# EAGLE board b pubsub_lower_bore_isolate 5V (EAGLE 9.4.2)
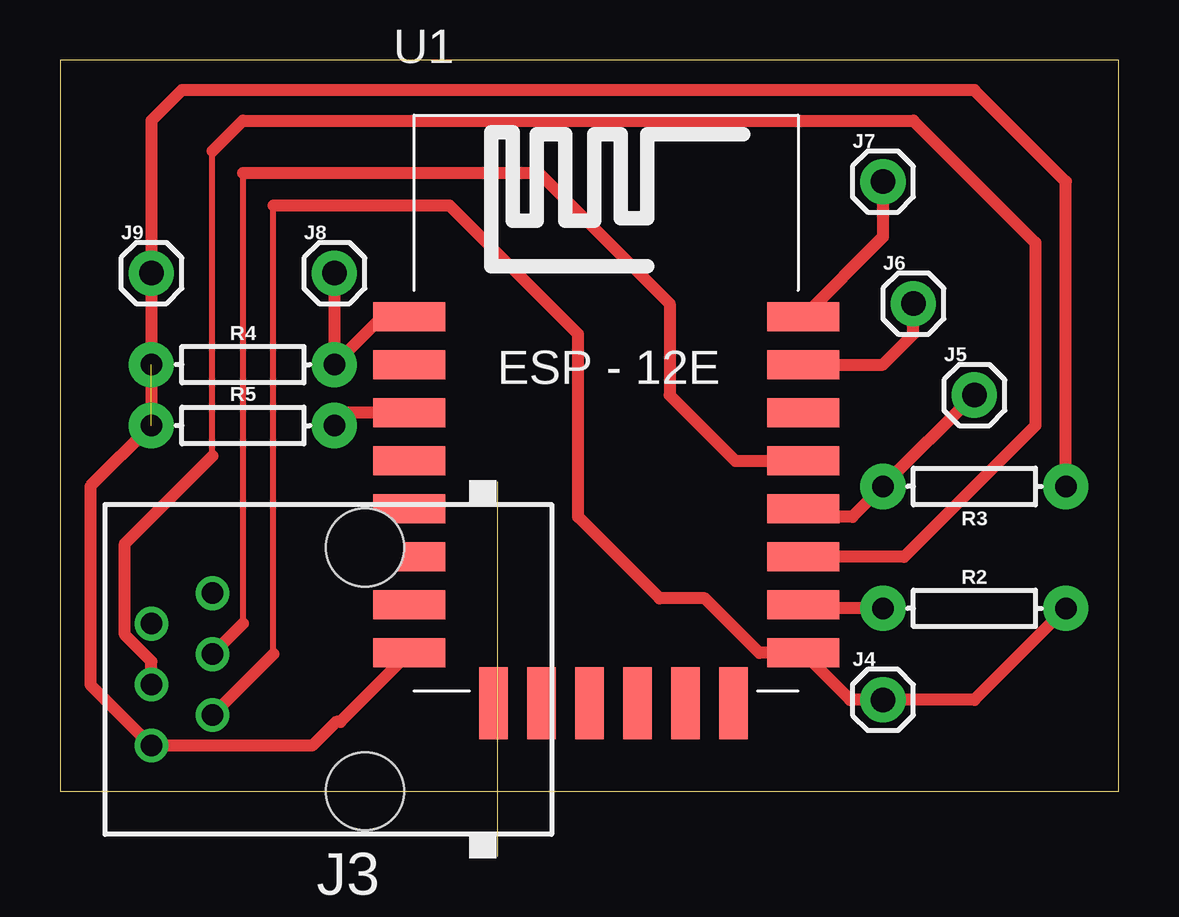
[diagram p0: board, top side]

Size 44.12 x 30.47 mm. Coordinates in mm from the lower left corner, seen from the top.
Outline: 0,0 44.12,0 44.12,30.47 0,30.47 0,0
Copper layers (1*16): Top 0.035mm / dielectric 1.5mm / Bottom 0.035mm
Design rules "default": minimum track width 6mil, minimum drill 0.35mm, track to track 6mil, track to pad 6mil, pad to pad 6mil, via to via 6mil, smd to smd 6mil, copper to edge 40mil, drill to drill 6mil, minimum pad ring 10mil, minimum via ring 8mil, stop-mask expansion 4mil, vias tented up to drill 0mil, thermal gap 10mil

## Footprints (pad centres in the part's own frame; a part is rotated, then mirrored left to right if it is on the bottom)
RJ11-NO_SHIELD = drill 0.9 pad 1.4: 1 -3.175,8.89; 2 -1.905,6.35; 3 -0.635,8.89; 4 0.635,6.35; 5 1.905,8.89; 6 3.175,6.35 | hole 3.251: -5.08,0; 5.08,0
1X01 = drill 1.016 pad 1.88: 1 0,0
AXIAL-0.3 = drill 0.9 pad 1.88: P$1 -3.81,0; P$2 3.81,0
ESP12E-SMD = smd 3 x 1.2: ADC -8.3,3.8; CH_PD -8.3,1.8; GND 8.1,-8.2; GPIO0 8.1,-2.2; GPIO2 8.1,-4.2; GPIO4 8.1,-0.2; GPIO5 8.1,1.8; GPIO12 -8.3,-4.2; GPIO13 -8.3,-6.2; GPIO14 -8.3,-2.2; GPIO15 8.1,-6.2; GPIO16 -8.3,-0.2; RESET -8.3,5.8; RXD0 8.1,3.8; TXD0 8.1,5.8; VCC -8.3,-8.2 | smd 1.2 x 3: CS0 -4.8,-10.3; GPIO9 -0.8,-10.3; GPIO10 1.2,-10.3; MISO -2.8,-10.3; MOSI 3.2,-10.3; SCLK 5.2,-10.3

## Placement (x,y rotation side)
J3  RJ11-6L-B  [RJ11-NO_SHIELD]  12.7,5.08 90 top
J4  [1X01]  34.29,3.81 0 top
J5  [1X01]  38.1,16.51 0 top
J6  [1X01]  35.56,20.32 0 top
J7  [1X01]  34.29,25.4 0 top
J8  [1X01]  11.43,21.59 0 top
J9  [1X01]  3.81,21.59 0 top
R2  1k  [AXIAL-0.3]  38.1,7.62 0 top
R3  1k  [AXIAL-0.3]  38.1,12.7 180 top
R4  1k  [AXIAL-0.3]  7.62,17.78 0 top
R5  1k  [AXIAL-0.3]  7.62,15.24 0 top
U1  [ESP12E-SMD]  22.86,13.97 0 top

## Library data of the parts
J3 = con-tycoelectronics; MF: TYCO ELECTRONICS; MPN: RJ11-6L-B; OC_FARNELL: unknown; OC_NEWARK: 52K3613
J4-J9 = SparkFun-Connectors
R2-R5 = SparkFun-Resistors; PROD_ID: RES-12182
U1 = esp8266modules

## Nets
+5V: J3.1 J9.1 R3.P$1 R4.P$1 R5.P$1 U1.VCC
GND: J3.2 J4.1 R2.P$2 U1.GND
N$1: J3.4 U1.GPIO4
N$3: R2.P$1 U1.GPIO15
N$4: J5.1 R3.P$2 U1.GPIO0
N$7: U1.GPIO5
N$13: J3.3 U1.GPIO2
N$14: J7.1 U1.TXD0
N$15: J6.1 U1.RXD0
N$16: J8.1 R4.P$2 U1.RESET
N$18: R5.P$2 U1.CH_PD

## Tracks (layer width: path | path; a pad name or v marks a point on that pad's centre or on a via)
+5V  (1 unrouted)
  Top 0.508: U1.VCC 11.69,2.9 11.5,2.9 10.51,1.91 J3.1 1.27,4.45 1.27,12.7 R5.P$1 J9.1 3.81,27.94 5.08,29.21 38.1,29.21 41.91,25.4 R3.P$1
GND
  Top 0.254: 8.89,5.71 8.89,24.41
  Top 0.508: U1.GND 32.92,3.81 J4.1 38.1,3.81 R2.P$2 | 30.96,5.56 U1.GND | U1.GND 29.14,5.77 26.87,8.03 24.99,8.03 21.59,11.43 21.59,19.05 16.22,24.41 8.89,24.41 | J3.2 8.89,5.71
N$1
  Top 0.254: 7.62,25.76 7.62,6.99
  Top 0.508: U1.GPIO4 28.14,13.77 25.4,16.51 25.4,20.32 19.96,25.76 7.62,25.76 | 7.62,6.99 J3.4
N$3
  Top 0.508: R2.P$1 31.11,7.62 U1.GPIO15
N$4
  Top 0.508: U1.GPIO0 31.3,11.43 33.02,11.43 R3.P$2 J5.1
N$13
  Top 0.254: 6.35,13.97 6.35,26.67
  Top 0.508: J3.3 3.81,5.42 2.7,6.53 2.7,10.32 6.35,13.97 | 6.35,26.67 7.62,27.94 35.56,27.94 40.64,22.86 40.64,15.24 35.17,9.77 U1.GPIO2
N$14
  Top 0.508: J7.1 34.29,23.1 U1.TXD0
N$15
  Top 0.508: U1.RXD0 34.29,17.78 35.56,19.05 J6.1
N$16
  Top 0.508: U1.RESET 13.42,19.77 R4.P$2 J8.1
N$18
  Top 0.508: U1.CH_PD 11.96,15.77 R5.P$2